# Altium PCB Isolated_gate_driver.PcbDoc
Units mil, origin at the board's own origin, x right, y up, seen from the top; angles counter-clockwise.
Board outline 2085 x 3750 mil, 2 copper layers (Top Layer, Bottom Layer); 65 components, 53 nets, 241 pads, 45 vias.
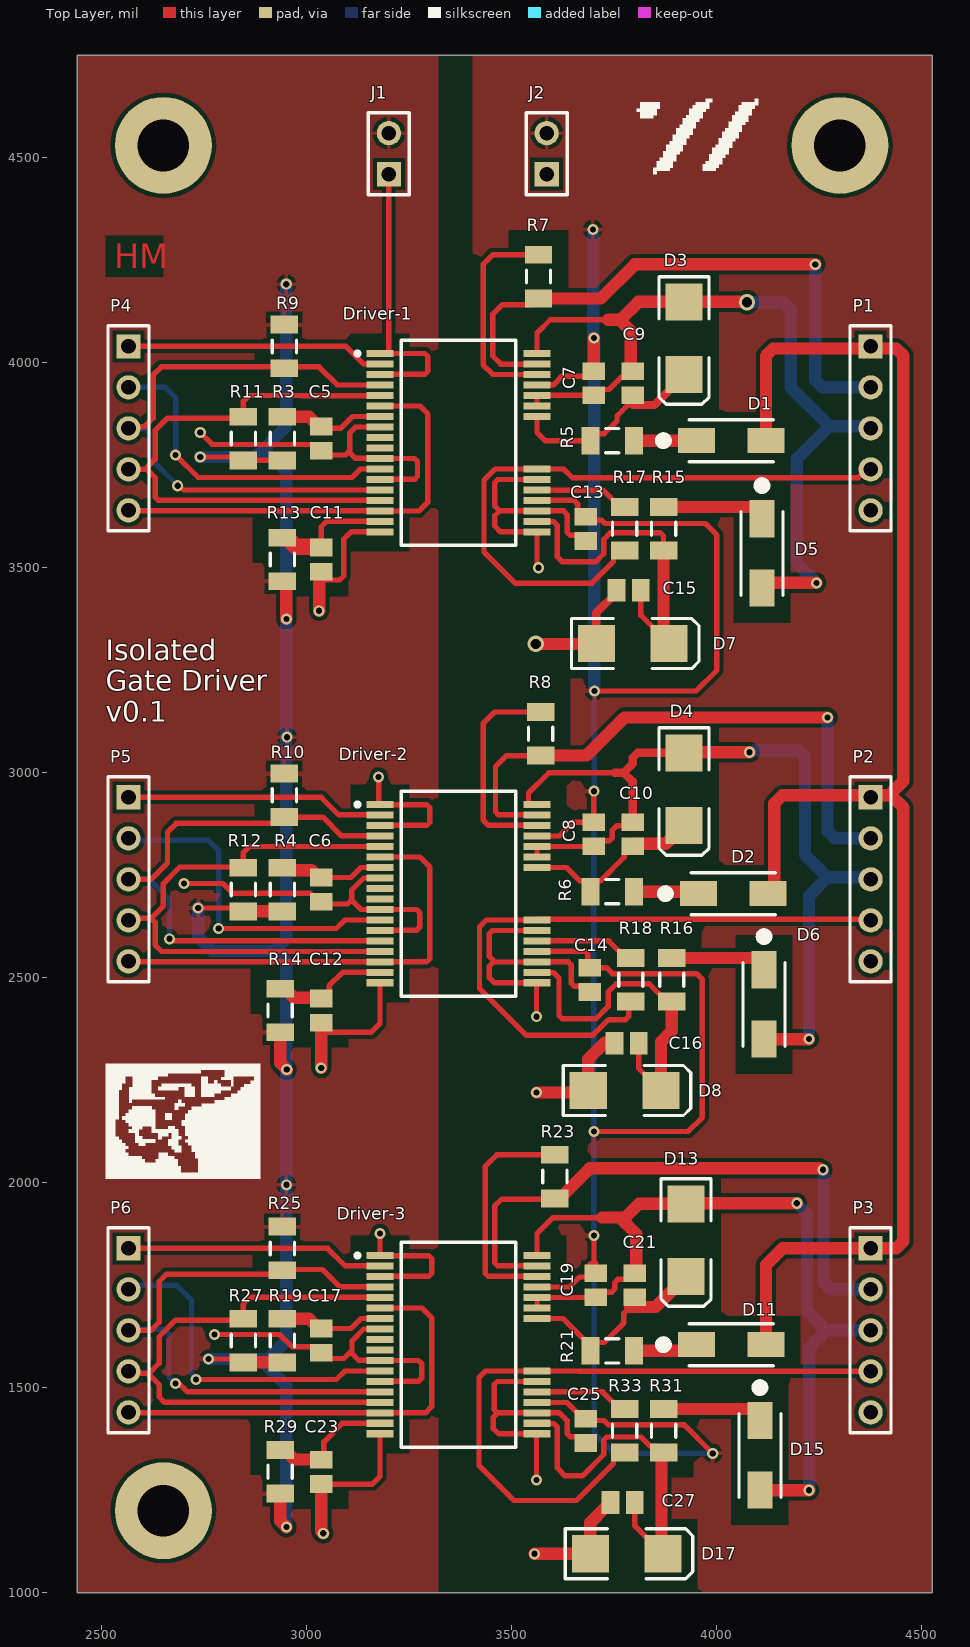
[diagram p0: Top Layer view]
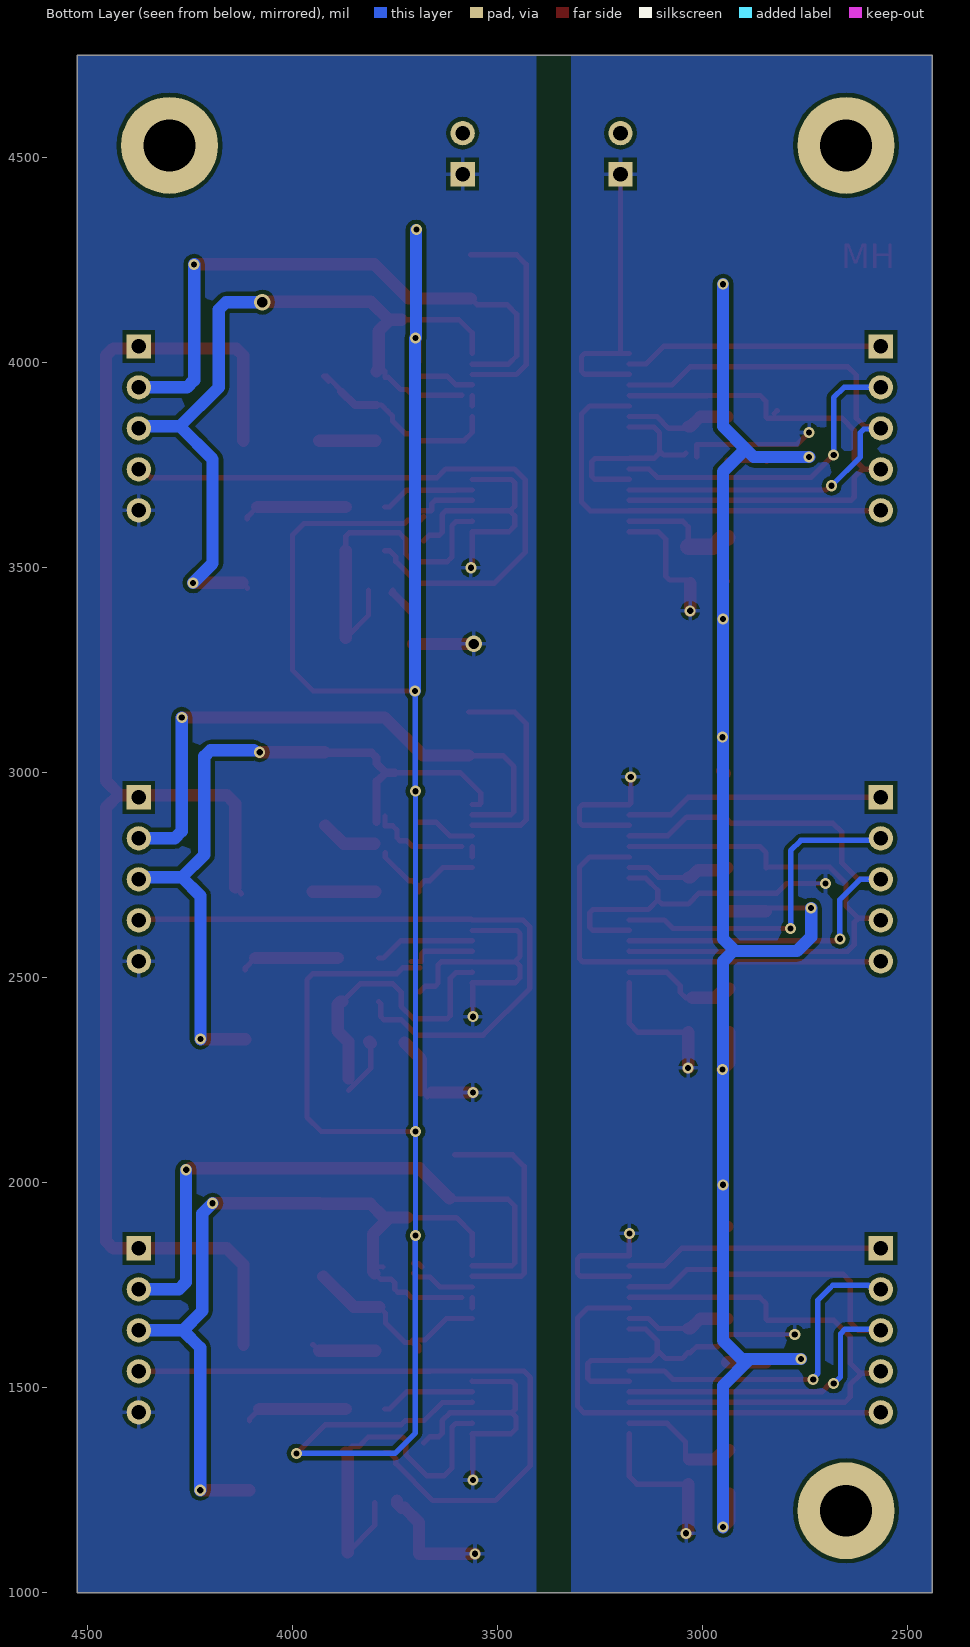
[diagram p1: Bottom Layer view, seen from below]

## Layer stack, top to bottom
Top Solder: solder mask 0.4, Solder Resist, Dk 3.5
Top Layer: signal copper 1.4
Dielectric 1: dielectric 12.6, FR-4, Dk 4.8
Bottom Layer: signal copper 1.4
Bottom Solder: solder mask 0.4, Solder Resist, Dk 3.5

## Board outline
2440,1000 4525,1000 4525,4750 2440,4750

## Design rules (kind name [scope] priority, off if disabled: settings)
Clearance [All] p1: gap=10 ignorepadtopadclearanceinfootprint=TRUE except(0: Arc-Hole Track-Hole SMDPad-Hole THPad-Hole Via-Hole Fill-Hole Poly-Hole Region-Hole Text-Hole; 6: SMDPad-SMDPad; 40: SMDPad-Fill SMDPad-Poly SMDPad-Region)
HoleSize [All] p1: absolutevalues=TRUE maxlimit=200 minlimit=1 maxpercent=80.000 minpercent=20.000
MinimumSolderMaskSliver [All] p1: minsoldermaskwidth=6
PolygonConnect [All] p1: connectstyle=Relief reliefconductorwidth=10 reliefentries=4 polygonreliefangle="90 Angle" airgapwidth=10
RoutingVias [All] p1: holewidth=15 width=27 viastyle="Through Hole" minholewidth=8 minwidth=15 maxholewidth=70 maxwidth=100
SilkToSilkClearance [All] p1: silktosilkclearance=6
SilkToSolderMaskClearance [IsPad] p1: minsilkscreentomaskgap=6 clearancetoexposedcopper=TRUE
SolderMaskExpansion [All] p1: expansion=4 istentingtop=FALSE
Width [All] p1: maxlimit=200 minlimit=6 preferedwidth=13 minimp=50.000000 maximp=50.000000 favimp=50.000000
26 further rules are at their usual default settings.

## Components (designator, comment, footprint, x,y, rotation, side; value= is the part's Value field where it differs from the comment)
C5 "Cap" C0805 3035,3815 r270 top value=100nF
C6 "Cap" C0805 3035,2715 r270 top value=100nF
C7 "Cap" C0805 3700,3950 r90 top value=1uF
C8 "Cap" C0805 3700,2850 r90 top value=1uF
C9 "Cap" C0805 3795,3950 r90 top value=220pF
C10 "Cap" C0805 3795,2850 r90 top value=220pF
C11 "Cap" C0805 3035,3520 r270 top value=100nF
C12 "Cap" C0805 3035,2420 r270 top value=100nF
C13 "Cap" C0805 3680,3595 r90 top value=1uF
C14 "Cap" C0805 3690,2495 r90 top value=1uF
C15 "Cap" C0805 3785,3445 r180 top value=220pF
C16 "Cap" C0805 3780,2340 r180 top value=220pF
C17 "Cap" C0805 3035,1615 r270 top value=100nF
C19 "Cap" C0805 3705,1750 r90 top value=1uF
C21 "Cap" C0805 3800,1750 r90 top value=220pF
C23 "Cap" C0805 3035,1295 r270 top value=100nF
C25 "Cap" C0805 3680,1395 r90 top value=1uF
C27 "Cap" C0805 3770,1220 r180 top value=220pF
D1 "1N4007" "M7 SMA" 4040,3805 r0 top
D2 "1N4007" "M7 SMA" 4045,2700 r0 top
D3 "1N5822" SMB 3920,4060 r270 top
D4 "1N5822" SMB 3920,2960 r270 top
D5 "1N4007" "M7 SMA" 4105,3530 r270 top
D6 "1N4007" "M7 SMA" 4110,2430 r270 top
D7 "1N5822" SMB 3795,3315 r0 top
D8 "1N5822" SMB 3775,2225 r0 top
D11 "1N4007" "M7 SMA" 4040,1600 r0 top
D13 "1N5822" SMB 3925,1860 r270 top
D15 "1N4007" "M7 SMA" 4100,1330 r270 top
D17 "1N5822" SMB 3780,1095 r0 top
Driver-1 "2ED020I12FA" SOP65P1030X265-36_32N-V 3370,3805 r0 top
Driver-2 "2ED020I12FA" SOP65P1030X265-36_32N-V 3370,2705 r0 top
Driver-3 "2ED020I12FA" SOP65P1030X265-36_32N-V 3370,1605 r0 top
J1 "Header 2" HDR1X2 3200,4460 r90 top
J2 "Header 2" HDR1X2 3585,4460 r90 top
P1 "Header 5" HDR1X5 4375,4040 r270 top
P2 "Header 5" HDR1X5 4375,2940 r270 top
P3 "Header 5" HDR1X5 4375,1840 r270 top
P4 "Header 5" HDR1X5 2565,4040 r270 top
P5 "Header 5" HDR1X5 2565,2940 r270 top
P6 "Header 5" HDR1X5 2565,1840 r270 top
R3 "Res3" C1206 2940,3815 r90 top value=10R
R4 "Res3" C1206 2940,2715 r90 top value=10R
R5 "Res3" C1206 3745,3810 r0 top value=1k
R6 "Res3" C1206 3745,2710 r0 top value=1k
R7 "Res3" C1206 3565,4210 r270 top value=10R
R8 "Res3" C1206 3570,3095 r270 top value=10R
R9 "Res3" C1206 2945,4040 r270 top value=4k7
R10 "Res3" C1206 2945,2945 r270 top value=4k7
R11 "Res3" C1206 2845,3815 r90 top value=4k7
R12 "Res3" C1206 2845,2715 r90 top value=4k7
R13 "Res3" C1206 2940,3520 r90 top value=10R
R14 "Res3" C1206 2935,2420 r90 top value=10R
R15 "Res3" C1206 3870,3595 r90 top value=1k
R16 "Res3" C1206 3890,2495 r90 top value=1k
R17 "Res3" C1206 3775,3595 r270 top value=10R
R18 "Res3" C1206 3790,2495 r270 top value=10R
R19 "Res3" C1206 2940,1615 r90 top value=10R
R21 "Res3" C1206 3745,1590 r0 top value=1k
R23 "Res3" C1206 3605,2015 r270 top value=10R
R25 "Res3" C1206 2940,1840 r270 top value=4k7
R27 "Res3" C1206 2845,1615 r90 top value=4k7
R29 "Res3" C1206 2935,1295 r90 top value=10R
R31 "Res3" C1206 3870,1395 r90 top value=1k
R33 "Res3" C1206 3775,1395 r270 top value=10R

## Footprints (in the part's own frame and the unit in brackets; to place one, negate y for a bottom-side part, rotate by r counter-clockwise, add the part's x,y. Pads: shape width x height; smd on the part's side, far side on the other; paste and mask are expansions set on the pad)
C0805 [mm] "Chip Capacitor, Body 2.0x1.3mm, IPC High Density"
  rect 1.1x1.4 smd: 1(-0.75,0) 2(0.75,0)
  body extent -1.1,-0.72 1.1,0.72, height 1.4
C1206 [mm] "Chip Capacitor, Body 3.2x1.6mm, IPC High Density"
  rect 1.1x1.7 smd: 1(-1.35,0) 2(1.35,0)
  silkscreen extent -0.4,-0.75 0.4,0.75, body extent -1.7,-0.9 1.7,0.9, height 1.3
HDR1X2 [mm] "Connector; Header; 2 Position"
  rect 1.5x1.5 hole 0.9: 1(0,0)
  round 1.5 hole 0.9: 2(2.54,0)
  silkscreen extent -1.27,-1.27 3.81,1.27
HDR1X5 [mm] "Connector; Header; 5 Position"
  rect 1.5x1.5 hole 0.9: 1(0,0)
  round 1.5 hole 0.9: 2(2.54,0) 3(5.08,0) 4(7.62,0) 5(10.16,0)
  silkscreen extent -1.27,-1.27 11.43,1.27
"M7 SMA" [mm]
  rect 2.3x1.55 smd: 1(-2.277,0.127) 2(2.023,0.127)
  silkscreen extent -4.75,-1.17 2.47,1.43
SMB [mm] "DO-214-AA/SMB; 2 C-Bend Leads; Body 5.3 x 3.6 mm, inc. leads (LxW)"
  rect 2.3x2.3 smd: 1(-2.25,0) 2(2.25,0)
  silkscreen extent -3.8,-1.55 4.1,1.55
SOP65P1030X265-36_32N-V [mm] "SOP,0.65mm pitch;32 pin,7.50mm W X 12.70mm L X 2.65mm H body"
  rect 1.67x0.45 smd paste+0 mask+0: 1(-4.865,5.525) 2(-4.865,4.875) 3(-4.865,4.225) 4(-4.865,3.575) 5(-4.865,2.925) 6(-4.865,2.275) 7(-4.865,1.625) 8(-4.865,0.975) 9(-4.865,0.325) 10(-4.865,-0.325) 11(-4.865,-0.975) 12(-4.865,-1.625) 13(-4.865,-2.275) 14(-4.865,-2.925) 15(-4.865,-3.575) 16(-4.865,-4.225) 17(-4.865,-4.875) 18(-4.865,-5.525) 19(4.865,-5.525) 20(4.865,-4.875) 21(4.865,-4.225) 22(4.865,-3.575) 23(4.865,-2.925) 24(4.865,-2.275) 25(4.865,-1.625) 30(4.865,1.625) 31(4.865,2.275) 32(4.865,2.925) 33(4.865,3.575) 34(4.865,4.225) 35(4.865,4.875) 36(4.865,5.525)
  silkscreen extent -6.39,-6.35 3.55,6.35, body extent -5.15,-6.4 5.15,6.4, height 2.66

## Part data
C5 C6 C7 C8 C9 C10 C11 C12 C13 C14 C15 C16 C17 C19 C21 C23 C25 C27: "Capacitor", LatestRevisionDate=17-Jul-2002, LatestRevisionNote="Re-released for DXP Platform.", PackageDescription="Radial Cap, Thru-Hole; 2 Leads; 0.3 in Pin Spacing", PackageReference=RAD-0.3, Published=8-Jun-2000, Publisher="Altium Limited"
D1 D2 D5 D6 D11 D15: library part Diode, "Default Diode", Code_JEDEC=DO-214-AB, LatestRevisionDate=17-Jul-2002, LatestRevisionNote="Re-released for DXP Platform.", PackageDescription="DO-214-AB/SMC; 2 C-Bend Leads; Body 7.9 x 5.9 mm, inc. leads (LxW)", PackageReference=SMC, PackageVersion=Sep-1996, Published=8-Jun-2000, Publisher="Altium Limited"
D3 D4 D7 D8 D13 D17: library part "D Schottky", "Schottky Diode", Code_JEDEC=DO-214-AA, LatestRevisionDate=17-Jul-2002, LatestRevisionNote="Re-released for DXP Platform.", PackageDescription="DO-214-AA/SMB; 2 C-Bend Leads; Body 5.3 x 3.6 mm, inc. leads (LxW)", PackageReference=SMB, Published=8-Jun-2000, Publisher="Altium Limited"
Driver-1 Driver-2 Driver-3: "Dual IGBT Driver IC", Manufacturer="Infineon Technologies", ManufacturerPartNumber=2ED020I12FA, PackageReference=PG-DSO-36
J1 J2: "Header, 2-Pin", LatestRevisionDate=17-Jul-2002, LatestRevisionNote="Re-released for DXP Platform.", Publisher="Altium Limited"
P1 P2 P3 P4 P5 P6: "Header, 5-Pin", LatestRevisionDate=17-Jul-2002, LatestRevisionNote="Re-released for DXP Platform.", Publisher="Altium Limited"
R3 R4 R5 R6 R7 R8 R9 R10 R11 R12 R13 R14 R15 R16 R17 R18 R19 R21 R23 R25 R27 R29 R31 R33: "Resistor", LatestRevisionDate=29-May-2009, LatestRevisionNote="IPC-7351 Footprint Added.", PackageDescription="Chip Resistor", PackageReference=J1-0603, Published=8-Jun-2000, Publisher="Altium Limited"

## Free pads (board coordinates)
  round 236.22 hole 125.98: 1(2650,4530) 2(4300,4530) 3(2650,1200)

## Via types
v1: diameter 27, hole 15, Top Layer to Bottom Layer, 43 vias
v2: diameter 40, hole 25, Top Layer to Bottom Layer, 2 vias

## Nets (pads, with @x,y where several pads share a name; then routed paths per layer and width w, separated by ;. In a path a pad name is that pad's centre, name@x,y a point inside that pad or via, vN(x,y) a via of type N, cw(c..) or ccw(c..) an arc to the next point about the centre after c; other vN are vias at no path point)
15V: C7.2 C8.2 C13.2 C14.2 C19.2 C25.2 Driver-1.22 Driver-1.33 Driver-2.22 Driver-2.33 Driver-3.22 Driver-3.33 J2.2 | length 6667.1
  Top Layer w13: Driver-3.22 3561.77,1464.02 3634.6,1464.02 3678.62,1420 3724.7,1420 3734.7,1410 3920,1410 v1(3990,1340) ; Driver-3.33 3640.75,1745.75 3665,1770 3695.47,1770 C19.2 ; Driver-2.22 3679.32,2564.25 3685.51,2558.07 3685.51,2539.68 C14.2@3710.28,2539.68 ; Driver-2.33 3615.75,2845.75 3649.53,2879.53 C8.2 v1(3700,2955) ; Driver-1.22 3652.09,3664.25 3660.51,3655.83 3660.51,3639.68 3660.9,3639.29 C13.2@3700.67,3639.29 ; Driver-1.33 3561.77,3945.98 3601.24,3945.98 3622.68,3967.42 3700,3967.42 3700,4003.15 ; J2.2@3585,4580 J2.2@3586.44,4580 ; C13.2 3688.97,3615.56 3719.44,3615.56 3727,3608 3972,3608 4000,3580 4000,3250 3949.42,3199.42 v1(3701.64,3199.42) ; C19.2@3684.33,1794.29 3693.19,1803.15 3700.29,1803.15 3705,1803.15 3700.29,1807.86 v1(3700.29,1871.3) ; C14.2 3730.47,2524.53 3745,2510 3950,2510 3964.62,2495.38 3964.62,2159.62 3930,2125 v1(3700,2125)
  Top Layer w30: 3700,4003.15 v1(3700,4060)
  Bottom Layer w13: v1(3697.5,4325) v1@3698.75,4323.75 ; v1@3698.75,4061.25 v1(3700,4060) v1@3701.03,4058.97 ; v1@3701.03,3200.03 v1(3701.64,3199.42) 3700.82,3198.6 3700.82,2955.82 v1(3700,2955) v1(3700,2125) 3700,1871.59 v1(3700.29,1871.3) 3700.29,1389.71 3750,1340 v1(3990,1340)
  Bottom Layer w30: v1@3698.75,4061.25 v1@3698.75,4323.75 ; v1@3701.03,3200.03 v1@3701.03,4058.97
+5V: J1.2 R3.1 R4.1 R9.1 R10.1 R11.1 R12.1 R13.1 R14.1 R19.1 R25.1 R27.1 R29.1 | length 4641
  Top Layer w13: v1(2735,2670) 2836.85,2670 R12.1 ; v1(2740,3770) 2833.15,3770 2843.15,3760 R11.1 R3.1 ; v1(2760,1570) 2836.85,1570 R27.1 ; R13.1 R13.1@2950,3456.85 ; R9.1 R9.1@2949.7,4097.85 ; J1.2@3196.22,4556.22 J1.2
  Top Layer w30: R27.1 R19.1 ; R12.1 R4.1 ; R29.1 2935,1175 v1(2950,1160) ; R14.1 2935,2291.83 v1(2950.89,2275.94) ; R25.1 2943.35,1893.15 R25.1@2950,1899.8 ; R10.1 R10.1@2951.54,3004.69 ; v1(2950,3375) R13.1@2950,3456.85
  Bottom Layer w13: 2920,2565 2925,2565 ; v1(2949.7,4191.6) v1@2950,4191.3 ; 2950,2595 2950,2600
  Bottom Layer w30: v1(2735,2670) 2735,2599.42 2769.42,2565 2920,2565 2950,2595 ; v1(2740,3770) 2875,3770 2895,3790 ; v1(2760,1570) 2885,1570 ; 2925,2565 2950,2540 v1(2950,1995) 2950,1615 2905,1570 2885,1570 ; v1(2950,1160) 2950,1420 2949.93,1420.07 2949.93,1444.93 2950,1445 2950,1505 2885,1570 ; 2950,2600 v1(2950,3375) 2950,3735 2895,3790 ; v1@2950,4191.3 2950,3845 2895,3790
  other v1: 2951.54,3086.68
GND: C13.1 C14.1 C15.2 C16.2 C25.1 C27.2 D7.1 D8.1 D17.1 Driver-1.19 Driver-1.21 Driver-1.24 Driver-2.19 Driver-2.21 Driver-2.24 Driver-3.19 Driver-3.21 Driver-3.24 J2.1 P1.5 P2.5 P3.5 | length 3033.4
  Top Layer w13: v1(3560,1275) 3560,1385.94 Driver-3.19 3561.3,1387.71 3467.29,1387.71 3455,1400 3455,1428.66 3465,1438.66 ; v1(3560,2405) 3560,2485.12 3561.54,2486.66 Driver-2.19 3457.52,2487.48 3445,2500 3445,2528.43 3455,2538.43 ; Driver-3.24 3561.3,1515.2 3464.46,1515.2 3456.85,1507.59 3456.85,1446.82 3465,1438.66 ; Driver-2.24 3561.3,2615.2 3452.62,2615.2 3445,2607.59 3445,2551.71 3455,2541.71 3455,2538.43 ; Driver-1.24 3561.3,3715.2 3465.8,3715.2 3458.18,3707.59 3458.18,3650 3458.66,3650 3470,3638.66 ; v1(3565,3500) 3561.54,3503.46 Driver-1.19 3472.52,3587.48 3458.18,3601.82 3458.18,3626.85 3470,3638.66 ; D8.1@3660.99,2220 3671.2,2209.79 D8.1 ; C25.1 3664.85,1380.63 3642.62,1380.63 3635,1388.24 3635,1420 3616.34,1438.66 Driver-3.21 3465,1438.66 ; C13.1 3666.59,3578.88 3642.62,3578.88 3635,3586.49 3635,3630 3626.34,3638.66 Driver-1.21 3470,3638.66 ; C14.1 3676.59,2478.88 3652.62,2478.88 3645,2486.49 3645,2531.05 3637.38,2538.66 Driver-2.21 3561.3,2538.43 3455,2538.43 ; 3726.85,2338.19 3726.85,2350 ; C15.2@3755.47,3439.09 C15.2
  Top Layer w20: D7.1@3705.65,3314.23 3705.65,3389.27 C15.2@3755.47,3439.09
  Top Layer w30: v1(3555,1095) D17.1 3691.42,1171.42 3727.44,1207.44 3733.82,1207.44 3745,1218.62 C27.2@3745,1225 ; v2(3558.03,3314.23) D7.1@3705.65,3314.23 ; v1(3560,2220) D8.1@3660.99,2220 ; D8.1 3686.42,2301.42 3726.85,2341.85
  Bottom Layer w13: v1@3555,2215 v1(3560,2220) v1@3558.03,2221.97 ; v2(3558.03,3314.23) v2@3559.02,3315.21
  Bottom Layer w30: P3.5@4375,1445 P3.5@4380.56,1450.56 ; P2.5@4375,2545 P2.5@4382.86,2545 ; P1.5@4375,3645 P1.5@4377.43,3645
H_OUT1: Driver-1.35 P1.2 R7.2 | length 1488.1
  Top Layer w13: Driver-1.35 3561.3,3996.7 3473.3,3996.7 3453,4017 3453,4118 3476.7,4141.7 3549.85,4141.7 R7.2
  Top Layer w30: R7.2 3716.91,4156.85 3800.06,4240 v1(4240,4240) ; P1.2@4375,3945 P1.2@4375,3952.86
  Bottom Layer w30: v1(4240,4240) 4240,3957.57 4257.57,3940 P1.2
H_OUT2: Driver-2.35 P2.2 R8.2 | length 1464.4
  Top Layer w13: Driver-2.35 3561.3,2897.16 3467.62,2897.16 3460,2904.78 3460,3015 3486.85,3041.85 R8.2
  Top Layer w30: R8.2 3681.85,3041.85 3775,3135 v1(4270,3135)
  Bottom Layer w30: v1(4270,3135) 4270,2857.57 4287.57,2840 P2.2
H_OUT3: Driver-3.35 P3.2 R23.2 | length 1482.5
  Top Layer w13: Driver-3.35 3561.3,1797.16 3465.62,1797.16 3458,1804.78 3458,1943 3474.65,1959.65 3602.8,1959.65 R23.2 R23.2@3616.81,1961.85 ; v1@4250,2035 4250.57,2034.43 4256.65,2034.43 v1(4259.32,2031.75)
  Top Layer w30: R23.2@3616.81,1961.85 3689.96,2035 v1@4250,2035
  Bottom Layer w13: v1(4259.32,2031.75) v1@4260,2031.08
  Bottom Layer w30: v1@4260,2031.08 4260,1757.57 4277.57,1740 P3.2
L_OUT1: Driver-1.25 P1.4 R17.2 | length 1563.6
  Top Layer w13: R17.2 3763.19,3541.85 3748.04,3526.7 3748.04,3514.89 3695.65,3462.5 3507.5,3462.5 3432,3538 3432,3713.93 3458.86,3740.79 3561.3,3740.79 Driver-1.25 3626.45,3741.02 3647.88,3719.59 4344.59,3719.59 4370,3745 P1.4@4375,3745
L_OUT2: Driver-2.25 P2.4 R18.2 | length 1581.3
  Top Layer w13: R18.2 3785,2436.85 3785,2405.35 3777.38,2397.73 3735.66,2397.73 3697.93,2360 3535,2360 3421.09,2473.91 3421.09,2624.27 3437.62,2640.79 3561.3,2640.79 Driver-2.25 3563.52,2643.01 4373.01,2643.01 P2.4@4375,2645
L_OUT3: Driver-3.25 P3.4 R33.2 | length 1624.6
  Top Layer w13: R33.2 3763.19,1341.85 3748.04,1326.7 3748.04,1314.89 3658.15,1225 3505,1225 3420,1310 3420,1525 3435.79,1540.79 3561.3,1540.79 Driver-3.25 3662.37,1541.02 3663.36,1540.04 4370.04,1540.04 P3.4@4375,1545
NetC5_1: C5.1 Driver-1.7 R3.2 | length 265.3
  Top Layer w13: C5.1@3030,3840 3082.47,3840 3111.22,3868.74 3178.23,3868.74 Driver-1.7
  Top Layer w30: R3.2 3005.47,3868.15 3029.09,3844.53 C5.1
NetC6_1: C6.1 Driver-2.7 R4.2 | length 258.4
  Top Layer w13: C6.1 3107.6,2744.53 3131.82,2768.74 3178.23,2768.74 Driver-2.7
  Top Layer w30: R4.2 2945.67,2762.48 3011.14,2762.48 3029.09,2744.53 C6.1
NetC9_1: C9.1 D3.2 Driver-1.30 R5.1 | length 502
  Top Layer w13: Driver-1.30 3561.54,3829.73 3581.27,3810 R5.1 3691.85,3812.09 3707,3827.24 3725.39,3827.24 3756.27,3858.12 3756.27,3869.93 3768.04,3881.7 3783.19,3896.85 3795,3896.85 ; D3.2@3881.22,3930.11 3881.22,3932.64 3907.9,3959.32 3915.68,3967.1 3924.32,3967.1 3920,3962.77 D3.2@3912.23,3955
  Top Layer w20: 3795,3896.85 3847.96,3896.85 D3.2@3881.22,3930.11
NetC10_1: C10.1 D4.2 Driver-2.30 R6.1 | length 423.2
  Top Layer w13: Driver-2.30 3632.87,2768.98 3664.89,2736.96 3676.7,2736.96 R6.1@3691.85,2721.81 ; R6.1 R6.1@3691.85,2721.81 ; C10.1@3773.94,2805.32 3773.94,2793.94 3716.96,2736.96 3707,2736.96 R6.1@3691.85,2721.81
  Top Layer w30: C10.1@3800.19,2827.13 3875.71,2827.13 D4.2
NetC11_1: C11.1 Driver-1.17 R13.2 | length 301.8
  Top Layer w13: C11.1@3035,3551.18 3035,3600 3048.07,3613.07 Driver-1.17
  Top Layer w40: R13.2 2941.65,3571.5 2953.46,3571.5 2973.78,3551.18 C11.1@3035,3551.18
NetC12_1: C12.1 Driver-2.17 R14.2 | length 287.3
  Top Layer w13: C12.1@3025.24,2451.58 3041.39,2451.58 3054.49,2464.68 3054.49,2480.83 3086.73,2513.07 Driver-2.17
  Top Layer w30: R14.2 2941.65,2466.5 2953.46,2466.5 2968.38,2451.58 C12.1@3025.24,2451.58
NetC15_1: C15.1 D7.2 Driver-1.20 R15.1 | length 839
  Top Layer w13: Driver-1.20 3561.77,3612.84 3601.24,3612.84 3610.91,3603.17 3610.91,3526.71 3622.62,3515 3705,3515 3724.06,3534.06 3724.06,3569.36 3739.7,3585 3862.38,3585 3870,3577.38 R15.1 ; C15.1 3814.53,3384.06 D7.2@3870,3328.58 ; 3866.11,3425 3870,3425 3870,3421.26
  Top Layer w20: 3869.86,3425.14 3870,3425
  Top Layer w30: D7.2@3870,3328.58 3870,3421.26 ; 3870,3425 R15.1
NetC16_1: C16.1 D8.2 Driver-2.20 R16.1 | length 839
  Top Layer w13: Driver-2.20 3561.77,2512.84 3601.24,2512.84 3615,2499.08 3615,2407.62 3622.62,2400 3705,2400 3735,2430 3735,2465.3 3754.7,2485 3835.04,2485 R16.1@3878.19,2441.85 ; C16.1 3809.53,2279.06 D8.2
  Top Layer w30: C16.1 C16.1@3813.14,2343.61 ; D8.2@3863.58,2255 3863.58,2343.61 3890,2370.02 3890,2435.2 3883.35,2441.85 R16.1@3878.19,2441.85
NetC17_1: C17.1 Driver-3.7 R19.2 | length 258.4
  Top Layer w13: C17.1 3107.6,1644.53 3131.82,1668.74 3178.23,1668.74 Driver-3.7
  Top Layer w30: R19.2 3005.47,1668.15 3029.09,1644.53 C17.1
NetC21_1: C21.1 D13.2 Driver-3.30 R21.1 | length 524.8
  Top Layer w13: Driver-3.30 3624.68,1668.98 3677.05,1616.62 3706.65,1616.62 3691.85,1601.81 R21.1 3691.85,1595.24 3707,1610.39 3725.39,1610.39 3773.04,1658.04 3773.04,1681.7 3788.19,1696.85
  Top Layer w30: 3788.19,1696.85 3850.43,1696.85 D13.2
NetC23_1: C23.1 Driver-3.17 R29.2 | length 314.8
  Top Layer w13: C23.1@3032.74,1325 3041.38,1325 3041.38,1368.14 3086.31,1413.07 Driver-3.17
  Top Layer w30: R29.2 2941.65,1341.5 2953.46,1341.5 2969.96,1325 C23.1@3032.74,1325
NetC27_1: C27.1 D17.2 Driver-3.20 R31.1 | length 889.8
  Top Layer w13: Driver-3.20 3561.77,1412.84 3601.98,1412.84 3610.91,1403.91 3610.91,1304.09 3630,1285 3672.07,1285 3724.06,1336.98 3724.06,1372.39 3731.67,1380 3810.56,1380 3815.3,1380 3838.3,1357 3854.85,1357 R31.1 ; C27.1 3799.53,1164.06 D17.2@3865,1098.58
  Top Layer w30: D17.2@3865,1098.58 3865,1336.85 R31.1
NetD1_1: D1.1 R5.2 | length 143.9
  Top Layer w13: D1.1@3935,3810 D1.1@3940,3815
  Top Layer w30: R5.2 D1.1@3935,3810
NetD2_1: D2.1 R6.2 | length 159.3
  Top Layer w13: D2.1@3950.35,2710 D2.1
  Top Layer w30: R6.2 D2.1@3950.35,2710
NetD5_1: D5.1 R15.2 | length 254.4
  Top Layer w13: D5.1@4085.99,3648.15 4110,3624.14 D5.1
  Top Layer w30: R15.2 D5.1@4085.99,3648.15
NetD6_1: D6.1 R16.2 | length 239.4
  Top Layer w13: D6.1@4090.99,2548.15 4115,2524.14 D6.1
  Top Layer w30: R16.2 D6.1@4090.99,2548.15
NetD11_1: D11.1 R21.2 | length 158.4
  Top Layer w13: D11.1@3935.35,1590 D11.1
  Top Layer w30: R21.2 D11.1@3935.35,1590
NetD15_1: D15.1 R31.2 | length 249.4
  Top Layer w13: D15.1@4080.99,1448.15 4105,1424.14 D15.1
  Top Layer w30: R31.2 D15.1@4080.99,1448.15
NetDriver-1_2: Driver-1.2 P4.1 | length 631.3
  Top Layer w13: P4.1 3095,4040 3137.84,3997.16 3178.23,3997.16 Driver-1.2
NetDriver-1_4: Driver-1.4 Driver-1.14 P4.3 R9.2 | length 1468.9
  Top Layer w13: P4.3 2569.17,3844.17 2604.17,3844.17 2625,3865 2625,3970 2645,3990 2941.85,3990 R9.2 2948.15,3990 3030,3990 3074.25,3945.75 Driver-1.4 ; v1(2685,3700) 2688.79,3700 2698.95,3689.84 Driver-1.14
  Bottom Layer w13: P4.3 2566.41,3838.59 2606.41,3838.59 2615,3830 2615,3770 v1(2685,3700)
NetDriver-1_5: Driver-1.5 Driver-1.15 P4.4 R11.2 | length 1392
  Top Layer w13: P4.4 2610,3740 ; R11.2@2818.04,3883.3 R11.2@2825,3876.34 ; Driver-1.15 3178.23,3664.48 2637.62,3664.48 2630,3672.1 2630,3720 2610,3740 ; Driver-1.5 3178.23,3919.93 2987.62,3919.93 2987.54,3920 2859.07,3920 2845,3905.93 R11.2 2841.85,3865 2660,3865 2630,3835 2630,3765 2610,3745 2610,3740
NetDriver-1_6: Driver-1.6 Driver-1.16 P4.5 | length 1079.2
  Top Layer w13: P4.5 2566.34,3638.66 Driver-1.16 3178.7,3638.43 3273.43,3638.43 3295,3660 3295,3875 3275.67,3894.33 3178.7,3894.33 Driver-1.6
NetDriver-1_12: Driver-1.12 P4.2 | length 795.3
  Top Layer w13: v1(2680,3775) 2735,3720 3110,3720 3131.02,3741.02 Driver-1.12
  Bottom Layer w13: P4.2 2655,3940 2680,3915 v1(2680,3775)
NetDriver-1_23: Driver-1.23 R17.1 | length 230.7
  Top Layer w13: Driver-1.23 3561.77,3689.61 3603.01,3689.61 3603.22,3689.4 3721.94,3689.4 3763.19,3648.15 R17.1
NetDriver-1_34: Driver-1.34 R7.1 | length 530.9
  Top Layer w13: Driver-1.34 3453.66,3971.34 3430,3995 3430,4240 3453.15,4263.15 R7.1
NetDriver-2_2: Driver-2.2 P5.1 | length 631.3
  Top Layer w13: P5.1 3035,2940 3077.84,2897.16 3178.23,2897.16 Driver-2.2
NetDriver-2_4: Driver-2.4 Driver-2.14 P5.3 R10.2 | length 1471.3
  Top Layer w13: P5.3 2620,2740 2660,2780 2660,2855 2681.7,2876.7 2929.85,2876.7 R10.2 3039.09,2891.85 3084.96,2845.98 3178.23,2845.98 Driver-2.4 ; v1(2665,2595) 2670.16,2589.84 Driver-2.14
  Bottom Layer w13: P5.3 2615.95,2740 2665,2690.95 v1(2665,2595)
NetDriver-2_5: Driver-2.5 Driver-2.15 P5.4 R12.2 | length 1367.7
  Top Layer w13: P5.4 2570,2645 2620,2645 ; Driver-2.15 3178.23,2564.02 2645.98,2564.02 2630,2580 2630,2635 2620,2645 ; Driver-2.5 2860.16,2820.16 2845,2805 R12.2 2843.15,2770 2690,2770 2650,2730 2650,2675 2620,2645
NetDriver-2_6: Driver-2.6 Driver-2.16 P5.5 | length 1094
  Top Layer w13: P5.5 2566.11,2538.89 3178.23,2538.89 Driver-2.16 3178.7,2538.89 3292.38,2538.89 3300,2546.51 3300,2770 3275.67,2794.33 3178.7,2794.33 Driver-2.6
NetDriver-2_12: Driver-2.12 P5.2 | length 824.6
  Top Layer w13: v1(2785,2620) 3071.6,2620 3092.63,2641.02 Driver-2.12
  Bottom Layer w13: P5.2 2570,2835 2760,2835 2785,2810 v1(2785,2620)
NetDriver-2_23: Driver-2.23 R18.1 | length 245.9
  Top Layer w13: Driver-2.23 3561.68,2589.99 3736.35,2589.99 3778.19,2548.15 R18.1
NetDriver-2_34: Driver-2.34 R8.1 | length 523.9
  Top Layer w13: Driver-2.34 3561.3,2871.57 3443.43,2871.57 3430,2885 3430,3120 3458.15,3148.15 R8.1
NetDriver-3_2: Driver-3.2 P6.1 | length 631.3
  Top Layer w13: P6.1 3050.73,1840 3093.57,1797.16 3178.23,1797.16 Driver-3.2
NetDriver-3_4: Driver-3.4 Driver-3.14 P6.3 R25.2 | length 1491.1
  Top Layer w13: P6.3 2620,1640 2640,1660 2640,1759.59 2657.42,1777.01 2936.47,1777.01 2947.88,1788.42 3038.31,1788.42 3080.75,1745.98 3178.23,1745.98 Driver-3.4 Driver-3.4@3178.7,1745.52 ; v1(2680,1510) 2688.6,1510 2708.76,1489.84 Driver-3.14 Driver-3.14@3178.7,1490.07
  Bottom Layer w13: P6.3 2567.8,1642.8 2652.2,1642.8 2663.6,1631.4 2663.6,1526.4 v1(2680,1510)
NetDriver-3_5: Driver-3.5 Driver-3.15 P6.4 R27.2 | length 1363.8
  Top Layer w13: P6.4 2570,1535 2615,1535 ; Driver-3.15 3178.23,1464.48 2653.13,1464.48 2640,1477.62 2640,1507.5 2615,1532.5 2615,1535 ; Driver-3.5 3178.23,1720.39 2860.39,1720.39 2845,1705 R27.2 2841.85,1665 2680,1665 2640,1625 2640,1560 2615,1535
NetDriver-3_6: Driver-3.6 Driver-3.16 P6.5 | length 1099
  Top Layer w13: P6.5 2566.11,1438.89 3178.23,1438.89 Driver-3.16 3178.7,1438.89 3288.89,1438.89 3305,1455 3305,1670 3280.67,1694.33 3178.7,1694.33 Driver-3.6
NetDriver-3_12: Driver-3.12 P6.2 | length 828.4
  Top Layer w13: v1(2730,1520) 3071.6,1520 3092.63,1541.02 Driver-3.12
  Bottom Layer w13: P6.2 2573.81,1748.81 2594.46,1748.81 2595.64,1750 2682.38,1750 2690,1742.38 2718.73,1713.65 2718.73,1534.62 2730,1523.35 v1(2730,1520)
NetDriver-3_23: Driver-3.23 R33.1 | length 230.7
  Top Layer w13: Driver-3.23 3721.5,1489.84 3763.19,1448.15 R33.1
NetDriver-3_34: Driver-3.34 R23.1 | length 572.3
  Top Layer w13: Driver-3.34 3561.3,1771.57 3442.62,1771.57 3435,1779.19 3435,2040 3463.15,2068.15 R23.1
SGND: C5.2 C6.2 C11.2 C12.2 C17.2 C23.2 Driver-1.1 Driver-1.3 Driver-1.8 Driver-1.11 Driver-1.13 Driver-1.18 Driver-2.1 Driver-2.3 Driver-2.8 Driver-2.11 Driver-2.13 Driver-2.18 Driver-3.1 Driver-3.3 Driver-3.8 Driver-3.11 Driver-3.13 Driver-3.18 J1.1 | length 4922.3
  Top Layer w13: v1(2700,2730) 2795,2730 2818.63,2706.37 3008.19,2706.37 3034.57,2680 3099.05,2680 3109.11,2690.06 ; v1(2740,3830) 2769.37,3800.63 3013.94,3800.63 3014.33,3800.24 C5.2@3014.33,3770.71 ; v1(2775,1630) 2933.61,1630 2963.6,1600 2980.3,1600 3014.57,1600 C17.2@3029.09,1585.47 ; 3030,3461.85 3038.15,3470 3080,3470 3090,3480 3090,3570 3107.48,3587.48 Driver-1.18 ; C23.2@3035,1265 3160,1265 3178.46,1283.46 Driver-3.18 ; C17.2 3049.26,1571.22 3090,1571.22 3106.1,1587.31 3110,1591.22 ; 3035,2366.85 3156.85,2366.85 3178.46,2388.46 Driver-2.18 ; C5.2@3040.47,3780 3045.47,3775 3094.68,3775 3105,3785.32 3105,3830 3118.39,3843.39 Driver-1.8 ; 3102.34,3782.66 3118.15,3766.85 3178.23,3766.85 3178.7,3766.38 3262.38,3766.38 3270,3758.77 3270,3723.28 3262.38,3715.67 3178.7,3715.67 Driver-1.13 ; v1(3175,2990) 3175,2924.88 3177.36,2922.52 Driver-2.1 3178.7,2922.29 3292.38,2922.29 3300,2914.67 3300,2879.19 3292.38,2871.57 3178.7,2871.57 Driver-2.3 ; v1(3178.36,1876.45) 3178.46,1876.35 Driver-3.1 3178.7,1822.29 3297.38,1822.29 3305,1814.67 3305,1779.19 3297.38,1771.57 3178.7,1771.57 Driver-3.3 ; Driver-3.13 3178.7,1515.67 3272.38,1515.67 3280,1523.28 3280,1558.77 3272.38,1566.38 3178.7,1566.38 3178.23,1566.85 3126.56,1566.85 3110,1583.41 3110,1591.22 ; Driver-3.8 3178.23,1643.15 3138.76,1643.15 3110,1614.4 3110,1591.22 ; Driver-2.13 3178.7,2615.67 3267.38,2615.67 3275,2623.28 3275,2658.77 3267.38,2666.38 3178.7,2666.38 Driver-2.11 3132.07,2666.61 3109.11,2689.57 3109.11,2690.06 ; Driver-2.8 3178.23,2743.15 3138.76,2743.15 3109.11,2713.51 3109.11,2690.06 ; Driver-1.3 3178.7,3971.57 3287.38,3971.57 3295,3979.19 3295,4014.76 3287.38,4022.38 Driver-1.1@3197.64,4022.38 ; Driver-1.1 3197.64,4022.52 3200,4024.88 J1.1
  Top Layer w30: v1(3030,3395) 3030,3461.85 ; C23.2@3035,1265 3035,1150 v1(3040,1145) ; v1(3035,2280) 3035,2366.85
  Bottom Layer w13: v1@2697.32,2727.32 v1(2700,2730)
VCC: D1.2 D2.2 D11.2 P1.1 P2.1 P3.1 | length 3821.7
  Top Layer w13: D2.2 D2.2@4140,2720.35 ; 4420,2945 4425,2945
  Top Layer w30: D11.2 4119.65,1799.65 4160,1840 4437.43,1840 4455,1857.57 4455,2915 4425,2945 ; D1.2 4120,3810.35 4120,4017.43 4137.57,4035 4370,4035 P1.1 4380,4035 4437.43,4035 4455,4017.43 4455,2980 4420,2945 4375,2945 4160,2945 4140,2925 D2.2@4140,2720.35
VS1: C7.1 C9.2 D3.1 D5.2 Driver-1.31 Driver-1.32 Driver-1.36 P1.3 | length 2096.5
  Top Layer w13: Driver-1.31 Driver-1.32 ; Driver-1.36 3561.54,4024.88 3561.54,4072.81 3593.72,4105 3735,4105 ; Driver-1.32@3587.36,3920.39 3699.92,3920.39 C7.1 ; C7.1@3708.86,3922.44 3721.06,3934.64 3736.62,3934.64 3766.35,3964.37 3773.94,3964.37 3774.33,3964.76 3774.33,3979.33 C9.2@3784.76,3989.76 ; v2@4072.71,4148.58 v2(4073.62,4147.67) ; D5.2 D5.2@4122.78,3463.13
  Top Layer w30: 3735,4105 3762.5,4105 ; C9.2 3790,3984.53 3790,4077.5 3762.5,4105 ; v2@4072.71,4148.58 D3.1 3808.58,4148.58 3765,4105 3762.5,4105 ; D5.2@4122.78,3463.13 v1(4242.66,3463.13)
  Bottom Layer w30: v2(4073.62,4147.67) 4162.43,4147.67 4180,4130.09 4180,3940 4275,3845 ; v1(4242.66,3463.13) 4195,3510.79 4195,3765 4275,3845 ; P1.3 4370,3845 4275,3845
VS2: C19.1 C21.2 D13.1 D15.2 Driver-3.31 Driver-3.32 Driver-3.36 P3.3 | length 2162.1
  Top Layer w13: Driver-3.31 Driver-3.32 ; Driver-3.36 3561.54,1876.54 3600,1915 3720,1915 ; Driver-3.32@3586.97,1720 3710.43,1720 3723.56,1733.13 3743.27,1733.13 3750.89,1740.75 3750.89,1756.76 3758.5,1764.37 3784.85,1764.37 C21.2 3805,1784.53 C21.2@3805,1797.24 ; C21.2@3780.17,1794.41 3797.52,1796.89 C21.2@3800,1797.24 ; D13.1 3928.58,1945 D13.1@3933.58,1950
  Top Layer w30: 3720,1915 3763.49,1915 ; C21.2 3803.49,1783.02 3803.49,1796.89 3803.49,1875 3763.49,1915 ; D13.1 3810.33,1948.58 3776.75,1915 3763.49,1915 ; D13.1@3933.58,1950 v1(4195,1950) ; D15.2 4105.35,1250 v1(4225,1250)
  Bottom Layer w30: v1(4195,1950) 4220,1925 4220,1687.5 4267.5,1640 ; v1(4225,1250) 4225,1597.5 4267.5,1640 ; P3.3 4267.5,1640
VS3: C8.1 C10.2 D4.1 D6.2 Driver-2.31 Driver-2.32 Driver-2.36 P2.3 | length 2110.2
  Top Layer w13: Driver-2.31 Driver-2.32 ; Driver-2.36 3543.15,2922.52 3540.79,2924.88 3540.79,2950.41 3590.38,3000 3750,3000 ; Driver-2.32@3586.97,2820 3707.18,2820 3721.06,2833.88 3737.38,2833.88 3745,2841.49 3745,2860 3755.56,2870.56 3773.94,2870.56 3774.33,2870.95 C10.2@3774.33,2894.29 ; D4.1 D4.1@3921.42,3050
  Top Layer w20: 3750,3000 3772.5,3000 ; C10.2 3795,2980 3792.5,2980 3772.5,3000 ; D4.1 3806.72,3048.58 3795,3036.87 3795,3022.5 3772.5,3000
  Top Layer w30: D4.1@3921.42,3050 v1(4080,3050) ; D6.2 v1(4224.65,2350.35)
  Bottom Layer w30: 4094.62,3055 4200,3055 4215,3040 4215,2800 4270,2745 ; v1(4224.65,2350.35) 4224.65,2699.65 4270,2745 ; P2.3 4370,2745 4270,2745
pads on no net: Driver-1.9 Driver-1.10 Driver-2.9 Driver-2.10 Driver-3.9 Driver-3.10

## Polygon pours and split planes (outlines as drawn)
no net on Top Solder (solid): 3320,4750 3405,4750 3405,1000 3320,1000
no net on Bottom Solder (solid): 3320,4750 3405,4750 3405,1000 3320,1000
15V on Top Layer "15V_L01_P009" (solid, remove dead copper, pour order 9): 3405,4750 4525,4750 4525,1000 3405,1000
+5V on Top Layer "+5V_L01_P012" (solid, remove dead copper, pour order 12): 2440,4750 3320,4750 3320,1000 2440,1000
GND on Bottom Layer "GND_L02_P014" (solid, remove dead copper, pour order 14): 3405,4750 4525,4750 4525,1000 3405,1000
SGND on Bottom Layer "SGND_L02_P013" (solid, remove dead copper, pour order 13): 2440,4750 3320,4750 3320,1000 2440,1000

## Other copper
Top Layer:
  text "HM" at 2530,4230 h60

## Silkscreen, mask and mechanical layers (free items; w line width, h text height)
Top Overlay:
  drawing of 9 lines, arcs and shapes, not listed
  text "Isolated  / Gate Driver / v0.1" at 2510,3125 h50